# Altium PCB PCB.PcbDoc
Units mil, origin at the board's own origin, x right, y up, seen from the top; angles counter-clockwise.
Board outline 5715.03 x 2645.03 mil, 2 copper layers (Top Layer, Bottom Layer); 37 components, 35 nets, 153 pads, 6 vias.
Unrouted connection lines stored in the file: 18.
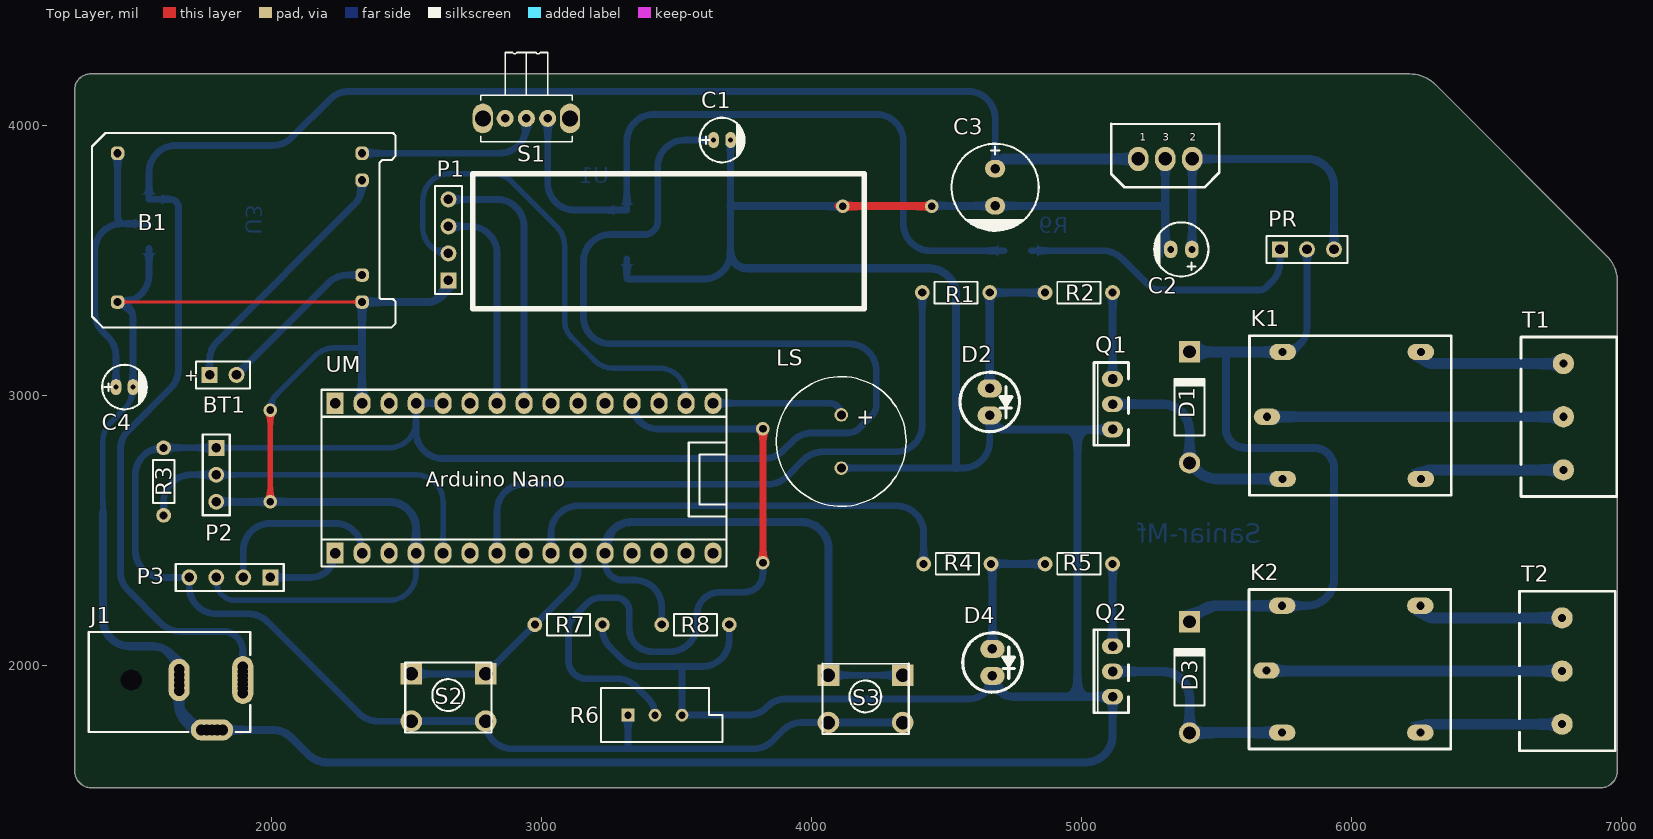
[diagram p0: Top Layer view]
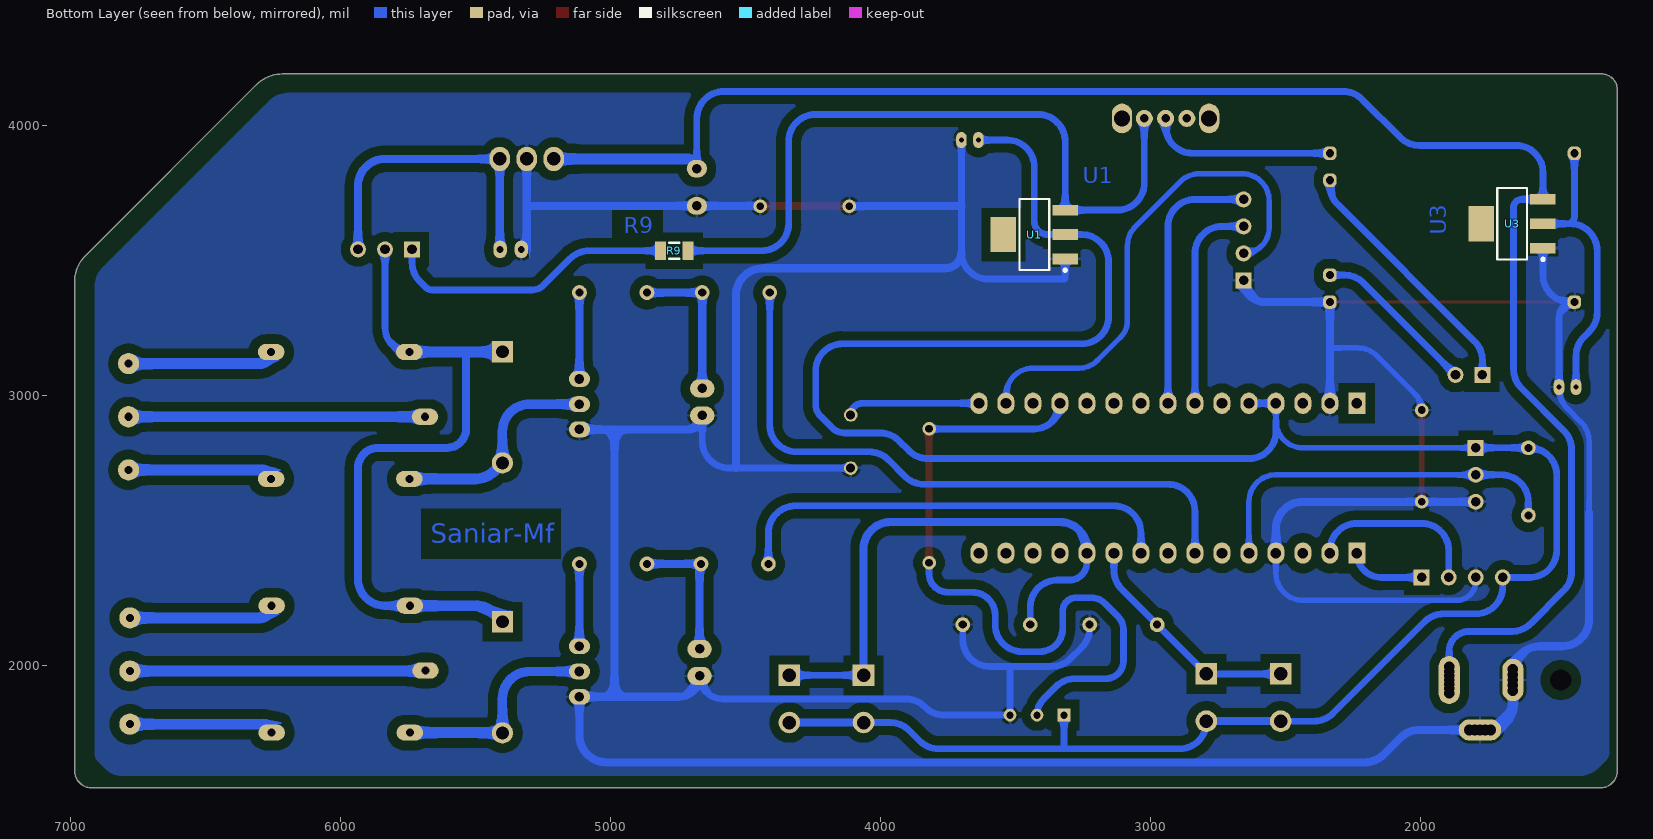
[diagram p1: Bottom Layer view, seen from below]
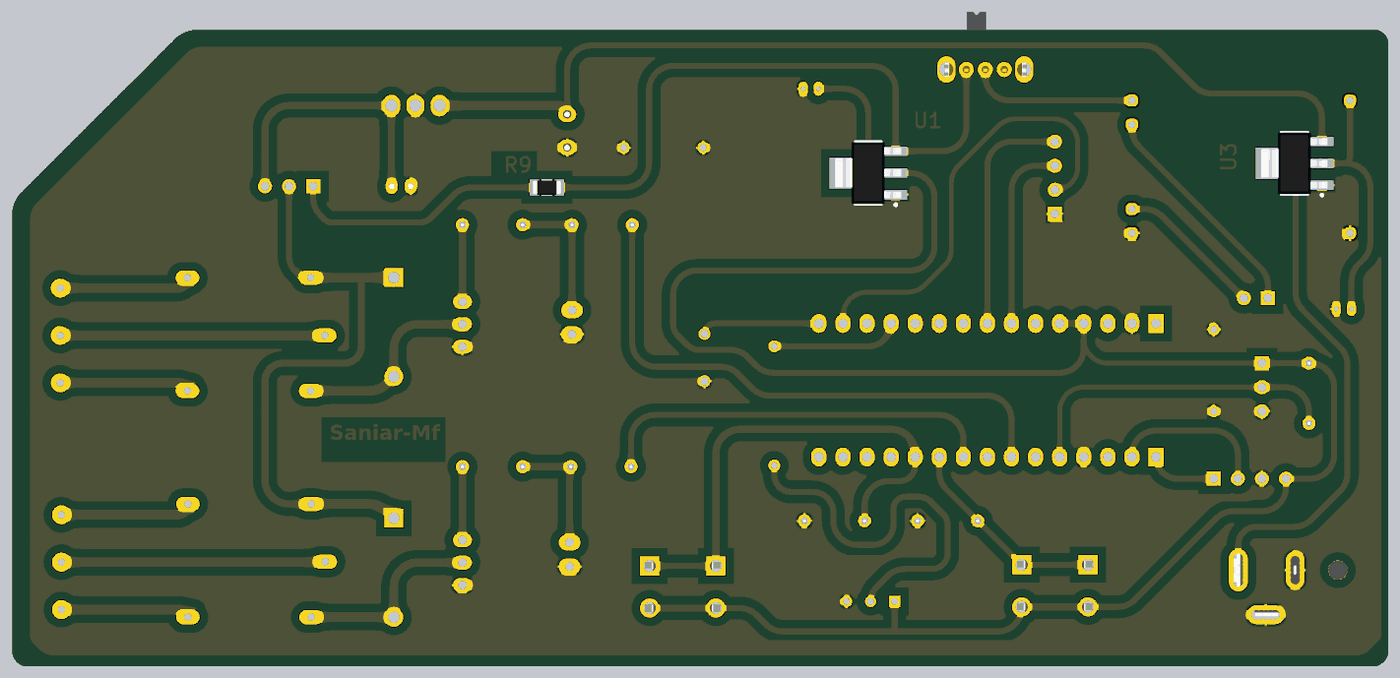
[diagram p2: 3D render of the assembled board from below, using the file's embedded part models]

## Layer stack, top to bottom
Top Solder: solder mask 0.4, Solder Resist, Dk 3.5
Top Layer: signal copper 1.4
Dielectric 1: dielectric 12.6, FR-4, Dk 4.8
Bottom Layer: signal copper 1.4
Bottom Solder: solder mask 0.4, Solder Resist, Dk 3.5

## Board outline
1269.98,1610 cw(c1285,1610) 1270.19,1612.5 cw(c1285,1615) 1269.98,1615 1269.98,4130 cw(c1330,4130) 1330,4190.02 6215,4190.02 cw(c6215,4054.29) 6310.97,4150.26 6945.26,3515.97 ccw(c6934.64,3505.36) 6945.25,3515.99 6945.26,3515.97 cw(c6849.29,3420) 6985.02,3420 6985.02,1610 cw(c6920,1610) 6920,1544.98 1335,1544.98 cw(c1335,1610)

## Design rules (kind name [scope] priority, off if disabled: settings)
Clearance Clearance_1 [InNamedPolygon('GND_L02_P008')] p1: gap=35 ignorepadtopadclearanceinfootprint=FALSE
Clearance [All] p2: gap=10 ignorepadtopadclearanceinfootprint=FALSE
Height [All] p1: minheight=0 maxheight=4000 prefheight=500
PolygonConnect [All] p1: connectstyle=Relief reliefconductorwidth=10 reliefentries=4 polygonreliefangle="90 Angle" airgapwidth=10
RoutingVias [All] p1: holewidth=28 width=50 viastyle="Through Hole" minholewidth=28 minwidth=50 maxholewidth=28 maxwidth=50
SolderMaskExpansion [All] p1: expansion=4
Width [All] p1: maxlimit=70 minlimit=10 preferedwidth=10
29 further rules are at their usual default settings.

## Components (designator, comment, footprint, x,y, rotation, side; value= is the part's Value field where it differs from the comment)
B1 "TP4056" TP4056 1429.49,3896.18 r0 top
BT1 "Battery" BAT-2 1820,3075 r0 top
C1 "10uf" "cap 00" 3668.5,3945 r180 top value=10uF
C2 "47uf" "cap 01" 5369.37,3540 r0 top value=47uF
C3 "220uf" "cap 03" 4680,3770 r90 top value=220uF
C4 "22uf" "cap 00" 1455,3030 r180 top value=22uF
D1 "Diode 1N4007" DO-41 5400,2955 r90 top
D2 "CoLED" LED_5MM 4660,3025 r90 top
D3 "Diode 1N4007" DO-41 5400,1955 r90 top
D4 "CoLED" LED_5MM 4670,2060 r90 top
J1 "Power Jack" "Power Jack" 1322.52,1945 r0 top
K1 "Relay-12vDC" Relays 5621.89,3220 r270 top
K2 "Relay-12vDC" Relays 5620,2280 r270 top
LS "Buzzer" XDCR_PS1240P02BT 4110,2828.43 r270 top
P1 "LCD" HDR1X4 2655,3425 r90 top
P2 "DS18B20" HDR1X3 1795,2805 r270 top
P3 "Serialout" HDR1X4 1995,2325 r180 top
PR "RelayVCC" HDR1X3 5735,3540 r0 top
Q1 "BD139" SOT-32 5174.06,2813.94 r90 top
Q2 "BD139" SOT-32 5174.06,1823.94 r90 top
R1 "180R" Res-(1/4) 4535,3380 r0 top value=180
R2 "1K" Res-(1/4) 4990,3380 r0 top
R3 "4.7K" Res-(1/4) 1600,2680 r270 top
R4 "180R" Res-(1/4) 4540,2375 r0 top value=180
R5 "1K" Res-(1/4) 4990,2375 r0 top
R6 "RPot" VR5 3420,1815 r0 top value=1K
R7 "10K" Res-(1/4) 3100,2150 r0 top
R8 "10K" Res-(1/4) 3570,2150 r0 top
R9 "1" "RES 1206 (3216X08L)" 4712.8,3535 r0 bottom
S1 "Switch SPDT_Subminiator" "SPDT Subminiator" 2943.74,4025 r0 top
S2 "Change" "Switch - Push to On" 2655,1880 r0 top
S3 "Mode" "Switch - Push to On" 4200,1875 r0 top
T1 "Terminal" "Terminal 1*3" 6627.52,3215.28 r270 top
T2 "Terminal" "Terminal 1*3" 6622.52,2273.43 r270 top
U1 "LM1117IMP-3.3" MP04A_N 3430,3595 r0 bottom
U3 "LM1117IMP-5.0" MP04A_N 1660,3635 r0 bottom
UM "Arduino Nano" PCBComponent_1 2975,2685 r180 top

## Footprints (in the part's own frame and the unit in brackets; to place one, negate y for a bottom-side part, rotate by r counter-clockwise, add the part's x,y. Pads: shape width x height; smd on the part's side, far side on the other; paste and mask are expansions set on the pad)
BAT-2 [mm] "Battery; 2 Leads"
  rect 1.5x1.5 hole 0.9: 1(-1.27,0)
  round 1.5 hole 0.9: 2(1.27,0)
  silkscreen extent -2.54,-1.27 2.54,1.27
"cap 00" [mm]
  oval 1x1.5 hole 0.5: 1(0.8,0) 2(-0.8,0)
  silkscreen extent -2.1,-2.1 2.1,2.1
"cap 01" [mil]
  oval 50x65 hole 25: 1(39.37,0) 2(-39.37,0)
  silkscreen extent -100,-100 100,100, body extent -99,-99 99,99, height 494
"cap 03" [mil]
  oval 65x75 hole 35: 1(68.9,0) 2(-68.9,0)
  silkscreen extent -161,-161 161,161, body extent -159,-159 157,158, height 473
DO-41 [mm] "Diode, Axial; Body 5.2 x 2.7 mm (LxDia. max), Lead Dia. 0.86 mm (max)"
  round 2 hole 1.2: 1(-5.23,0)
  rect 2x2 hole 1.2: 2(5.23,0)
  silkscreen extent -2.65,-1.4 2.75,1.4
HDR1X3 [mm] "Connector; Header; 3 Position"
  rect 1.5x1.5 hole 0.9: 1(0,0)
  round 1.5 hole 0.9: 2(2.54,0) 3(5.08,0)
  silkscreen extent -1.27,-1.27 6.35,1.27
HDR1X4 [mm] "Connector; Header; 4 Position"
  rect 1.5x1.5 hole 0.9: 1(0,0)
  round 1.5 hole 0.9: 2(2.54,0) 3(5.08,0) 4(7.62,0)
  silkscreen extent -1.27,-1.27 8.89,1.27
LED_5MM [mm]
  oval 1.7x2.3 hole 0.9: 1(0,0) 2(-2.54,0)
  silkscreen extent -4.07,-2.8 1.53,2.8
MP04A_N [mm] "SOT223, 4-Leads, Body 6.5x3.5mm, Pitch 2.3mm, Lead Span 7mm, IPC Medium Density"
  rect 2.4x1 smd: 1(-2.9,2.3) 2(-2.9,0) 3(-2.9,-2.3)
  rect 2.4x3.3 smd: 4(2.9,0)
  silkscreen extent -3.02,-3.35 1.4,3.47, body extent -3.49,-3.24 3.49,3.24, height 1.64
PCBComponent_1 [mm]
  rect 1.6x2 hole 1: 1(18.796,6.858) 30(18.796,-7.239)
  oval 1.6x2 hole 1: 2(16.256,6.858) 3(13.716,6.858) 4(11.176,6.858) 5(8.636,6.858) 6(6.096,6.858) 7(3.556,6.858) 8(1.016,6.858) 9(-1.524,6.858) 10(-4.064,6.858) 11(-6.604,6.858) 12(-9.144,6.858) 13(-11.684,6.858) 14(-14.224,6.858) 15(-16.764,6.858) 16(-16.764,-7.239) 17(-14.224,-7.239) 18(-11.684,-7.239) 19(-9.144,-7.239) 20(-6.604,-7.239) 21(-4.064,-7.239) 22(-1.524,-7.239) 23(1.016,-7.239) 24(3.556,-7.239) 25(6.096,-7.239) 26(8.636,-7.239) 27(11.176,-7.239) 28(13.716,-7.239) 29(16.256,-7.239)
  silkscreen extent -18.03,-8.51 20.07,8.13
"Power Jack" [mm] "Power Adaptor Jack"
  round 1.5 hole 1: 1(14.5,-1.25) 1(14.5,-0.8) 1(14.5,-0.4) 1(14.5,0.4) 1(14.5,0.8) 1(14.5,1.25) 2(8.5,-1) 2(8.5,1) 2(8.5,-0.5) 2(8.5,0.5) 3(10.6,-4.7) 3(11.1,-4.7) 3(12.1,-4.7) 3(12.6,-4.7)
  oval 2x4.5 hole 1: 1(14.5,0)
  oval 2x4 hole 1: 2(8.5,0)
  oval 4x2 hole 1: 3(11.6,-4.7)
  round 1.9 hole 2: MH(4,0)
  silkscreen extent 0,-4.9 15.2,4.5, body extent 0,-4.9 15.2,4.5, height 11
Relays [mil]
  oval 60x98.43 hole 30: 1(300,65) 2(60,635) 3(530,635) 4(60,123.11) 5(530,123.11)
  silkscreen extent 0,0 591,748
"RES 1206 (3216X08L)" [mm] "Chip Resistor, 2-Leads, Body 3.2x1.6mm, IPC High Density _ (0.125 W)"
  rect 1.05x1.7 smd: 1(0,0) 2(2.596,0)
  silkscreen extent 0.8,-0.75 1.8,0.75, body extent -0.23,-0.76 2.82,0.76, height 0.6
Res-(1/4) [mil]
  round 55 hole 30: 1(-125,0) 2(125,0)
  silkscreen extent -80,-40 80,40, body extent -135,-36 135,36, height 115
SOT-32 [mm]
  oval 1.5x2 hole 0.9: B(6.25,1.5) C(3.875,1.5) E(1.5,1.5)
  silkscreen extent 0,0 7.8,3.25
"SPDT Subminiator" [mm] "Subminiator SPDT switch"
  round 1.6 hole 0.8: 1(2,0) 2(0,0) 3(-2,0)
  oval 1.9x2.8 hole 1.5: M2(-4.1,0) M2(4.1,0)
  silkscreen extent -4.3,-2.2 4.3,6.2, body extent -4.31,-2.28 4.3,6.09, height 4.7
"Switch - Push to On" [mil]
  rect 80x80 hole 50: 1(-137.5,87.5) 1(137.5,87.5)
  round 80 hole 50: 2(-137.5,-87.5) 2(137.5,-87.5)
  silkscreen extent -160,-130 160,130, body extent -155,-121 157,123, height 205
"Terminal 1*3" [mm]
  round 2 hole 0.762: 1(2.5,4) 2(7.5,4) 3(12.5,4)
  silkscreen extent 0,0 15,9
TP4056 [mm]
  rrect70% 1.27x1.27 hole 0.762 mask+0.2: 1(0,0) 2(0,-14) 3(23,0) 4(23,-2.54) 5(23,-11.46) 6(23,-14)
  silkscreen extent -2.41,-16.38 26.16,1.91
VR5 [mm] "Thru-Hole; 3 Leads"
  rect 1.2x1.2 hole 0.7: 1(-2.54,0)
  round 1.2 hole 0.7: 2(0,0) 3(2.54,0)
  silkscreen extent -5.08,-2.54 6.35,2.54
XDCR_PS1240P02BT [mm]
  round 1.28 hole 0.85: 1(-2.5,0) 2(2.5,0)
  silkscreen extent -6.1,-6.1 6.1,6.1

## Part data
B1: "li ion charger board"
BT1: "Multicell Battery", LatestRevisionDate=17-Jul-2002, LatestRevisionNote="Re-released for DXP Platform.", PackageDescription="Battery; 2 Leads", PackageReference=BAT-2, Published=24-Mar-1999, Publisher="Altium Limited"
C1 C2 C4: library part Cap-Polar, "Polar Capacitor", Voltage=16V, Adding Date=1387/12/20, Designer="Saeid Jorablo", Organazation=ControTec
C3: library part Cap-Polar, "Polar Capacitor", Voltage=25V, Adding Date=1387/12/20, Designer="Saeid Jorablo", Organazation=ControTec
D1 D3: "1 Amp General Purpose Rectifier", Code_JEDEC=DO-204-AL, ComponentLink1Description="Manufacturer Link", ComponentLink1URL=http://www.fairchildsemi.com/, ComponentLink2Description=Datasheet, ComponentLink2URL=http://www.fairchildsemi.com/ds/1N%2F1N4001.pdf, DatasheetVersion=1998, LatestRevisionDate=17-Jul-2002, LatestRevisionNote="Re-released for DXP Platform.", PackageDescription="Diode, Axial; Body 5.2 x 2.7 mm (LxDia. max), Lead Dia. 0.86 mm (max)", PackageReference=DO-41, PackageVersion=Aug-1999, Published=8-Jun-2000, Publisher="Altium Limited"
D2 D4: library part LED, "Blue LED for Cooler"
K1: library part Relay-05vDC, "Cooler Relay", ComponentLinkURL=www.picpars.com, Designer="Seyed Mohsen Ghasemain"
K2: library part Relay-05vDC, "Heater Relay", ComponentLinkURL=www.picpars.com, Designer="Seyed Mohsen Ghasemain"
LS: library part PS1240P02BT, "Buzzers Transducer, Externally Driven Piezo 3V 4kHz 60dB @ 3V, 10cm Through Hole PC Pins", Package="2020 TDK", Availability=Unavailable, MF=TDK, MP=PS1240P02BT, Price=None, SnapEDA_Link=https://www.snapeda.com/parts/PS1240P02BT/TDK/view-part/53420/?ref=snap
P1: library part "Header 4", "I2C Oled", LatestRevisionDate=17-Jul-2002, LatestRevisionNote="Re-released for DXP Platform.", Publisher="Altium Limited"
P2 PR: library part "Header 3", "Header, 3-Pin", LatestRevisionDate=17-Jul-2002, LatestRevisionNote="Re-released for DXP Platform.", Publisher="Altium Limited"
P3: library part "Header 4", "Header, 4-Pin", LatestRevisionDate=17-Jul-2002, LatestRevisionNote="Re-released for DXP Platform.", Publisher="Altium Limited"
Q1 Q2: "NPN Transistor", De="Seyed Mohsen Ghasemian", E-mail=picpars@gmail.com, web=www.picpars.com
R1 R2 R3 R4 R5 R7 R8 R9: library part Resistor, "Resistor", Power="1/8 W", Tolerance=5%
R6: "Potentiometer", LatestRevisionDate=17-Jul-2002, LatestRevisionNote="Re-released for DXP Platform.", PackageDescription="Variable Resistor, Thru-Hole; 3 Leads", PackageReference=VR5, Published=8-Jun-2000, Publisher="Altium Limited", Set Position=0.5, Sim Note="Enter the Resistance value and the set point into parameter fields."
S1: "Subminiator SPDT Switch", Company=E.P.I.L, Design date=2011/11/02
S2 S3: library part "Switch PB", "Push Button Switch"
T1: library part "Terminal 1*3", "Cooler Terminal", ComponentLinkURL=www.picpars.com, Designer="Seyed Mohsen Ghasemain", E-mail=picpars@gmail.com
T2: library part "Terminal 1*3", "Heater Terminal", ComponentLinkURL=www.picpars.com, Designer="Seyed Mohsen Ghasemain", E-mail=picpars@gmail.com
U1: library part LM1117IMP-x.x, "3.3V Requlator. / if you use 3V relay Replace it with 15ohm Resistor :)", Manufacturer="National Semiconductor", PackageTopMarking=XYTT*N05B, PowerWise=N, Supplier Part Number 1=7614123, Code_IPC=SOT223-4, Code_JEDEC=TO-261-AA, ComponentLink1Description="LM1117 Datasheet", ComponentLink1URL=http://www.national.com/ds/LM/LM1117.pdf, ComponentLink2Description="LM1117 Web Page", ComponentLink2URL=http://www.national.com/pf/LM/LM1117.html, ComponentLink3Description="MP04A Package Page", ComponentLink3URL=http://www.national.com/packaging/folders/mp04a.html, CompType="LDO IC", DatasheetVersion=Apr-2006, PackageDescription="Molded SOT-223, 6.50 x 3.56 x 1.6mm Body, 4 Lead, 2.3mm Pitch", PackageReference=MP04A, PackageVersion="revB, Apr-2003", PartNumber=LM1117IMP-3.3, PinCount=4, Published=4-Dec-2008, Publisher="Altium Limited", RoHS=N, Supplier 1=Farnell
U3: library part LM1117IMP-x.x, "x.x Volt, 800mA Low-Dropout Linear Regulator, 4-pin SOT-223", Manufacturer="National Semiconductor", PackageTopMarking=XYTT*N05B, PartNumber=LM1117IMP-3.3, PowerWise=N, Supplier Part Number 1=7614123, Code_IPC=SOT223-4, Code_JEDEC=TO-261-AA, ComponentLink1Description="LM1117 Datasheet", ComponentLink1URL=http://www.national.com/ds/LM/LM1117.pdf, ComponentLink2Description="LM1117 Web Page", ComponentLink2URL=http://www.national.com/pf/LM/LM1117.html, ComponentLink3Description="MP04A Package Page", ComponentLink3URL=http://www.national.com/packaging/folders/mp04a.html, CompType="LDO IC", DatasheetVersion=Apr-2006, PackageDescription="Molded SOT-223, 6.50 x 3.56 x 1.6mm Body, 4 Lead, 2.3mm Pitch", PackageReference=MP04A, PackageVersion="revB, Apr-2003", PinCount=4, Published=4-Dec-2008, Publisher="Altium Limited", RoHS=N, Supplier 1=Farnell
UM: library part Component_1
J1: Adding Date=10/21/2009, Company=Personal, Designer="Saeid Jorablo", Project Name=Laser

## Free pads (board coordinates)
  oval 75x90 hole 50: 1(5210,3875) 2(5410,3875) 3(5310,3875)

## Via types
v1: diameter 50, hole 28, Top Layer to Bottom Layer, 6 vias

## Nets (pads, with @x,y where several pads share a name; then routed paths per layer and width w, separated by ;. In a path a pad name is that pad's centre, name@x,y a point inside that pad or via, vN(x,y) a via of type N, cw(c..) or ccw(c..) an arc to the next point about the centre after c; other vN are vias at no path point)
+5: B1.1 C4.1 U3.2 | length 1062.6
  Bottom Layer w25: C4.1 1423.5,3145.07 ccw(c1323.5,3145.07) 1394.21,3215.79 1374.29,3235.71 cw(c1445,3306.42) 1345,3306.42 1345,3535 cw(c1445,3535) 1445,3635 1455,3635 ; B1.1 1429.49,3660.51 ccw(c1455,3660.51) 1455,3635 ; U3.2 1455,3635
+12: C2.1 pad.2 PR.3 | length 1152.8
  Bottom Layer w30: C2.1 ccw(c5408.74,3541.26) 5410,3541.26 pad.2 5835,3875 cw(c5835,3775) 5935,3775 PR.3
BatVCC: R9.1 S1.1 U1.3 | length 2717.5
  Bottom Layer w25: S1.1 3022.48,3785.55 ccw(c3122.48,3785.55) 3122.48,3685.55 U1.3 3315.83,3940 cw(c3415.83,3940) 3415.83,4040 4240,4040 cw(c4240,3940) 4340,3940 4340,3635 ccw(c4440,3635) 4440,3535 R9.1
Cooler: R1.1 UM.7 | length 2375.3
  Bottom Layer w25: UM.7 2835,2570 cw(c2935,2570) 2935,2670 3838.58,2670 ccw(c3838.58,2770) 3909.29,2699.29 3970.71,2760.71 cw(c4041.42,2690) 4041.42,2790 4310,2790 ccw(c4310,2890) 4410,2890 R1.1
GND: B1.2 B1.6 C1.2 C2.2 C3.2 C4.2 D2.2 D4.2 J1.2 J1.3 LS.2 P1.1 P2.3 P3.3 pad.3 Q1.E Q2.E R6.3 R7.2 R8.2 U1.1 U3.1 UM.4 UM.29 | length 19224.1
  Top Layer w10: B1.2 B1.6
  Top Layer w20: v1(1995,2605) v1(1995,2945)
  Top Layer w30: v1@4100,3700 v1(4115,3700) v1(4445,3700)
  Bottom Layer w20: 1375,2565 1375,2828.58 cw(c1475,2828.58) 1404.29,2899.29 1457.21,2952.21 ccw(c1386.5,3022.92) 1486.5,3022.92 C4.2 ; P3.3 1795,2310 ccw(c1865,2310) 1865,2240 2435,2240 ccw(c2435,2340) 2535,2340 UM.4 ; v1(1995,2945) cw(c2079.5,2945) 2019.75,3004.75 2160.71,3145.71 cw(c2231.42,3075) 2231.42,3175 2335,3175
  Bottom Layer w25: C4.2 1486.5,3287.99 ccw(c1429.49,3287.99) B1.2 1445.83,3345 ccw(c1445.83,3445) 1545.83,3445 U3.1 ; R7.2 3225,2136.42 ccw(c3325,2136.42) 3254.29,2065.71 3295.71,2024.29 ccw(c3366.42,2095) 3366.42,1995 3520,1995 ; U1.1 3315.83,3434.17 ccw(c3320,3434.17) 3320,3430 3600,3430 ccw(c3600,3530) 3700,3530 3700,3700 C1.2 ; R8.2 3695,2095 cw(c3595,2095) 3595,1995 3520,1995 ; LS.2 4535,2730 4560,2730 ccw(c4560,2830) 4660,2830 4660,2871.57 ; D4.2 cw(c4585,1960) 4585,1875 3906.42,1875 ccw(c3906.42,1775) 3835.71,1845.71 3834.29,1844.29 cw(c3763.58,1915) 3763.58,1815 R6.3 3520,1995
  Bottom Layer w30: 1375,2565 1375,2170 ccw(c1475,2170) 1475,2070 1557.17,2070 cw(c1557.17,1970) 1657.17,1970 J1.2@1657.17,1964.68 ; P2.3 v1(1995,2605) 2435,2605 cw(c2435,2505) 2535,2505 UM.4 ; J1.3@1798.9,1759.96 1818.58,1759.96 2003.62,1759.96 cw(c2003.62,1659.96) 2074.33,1730.67 2135.71,1669.29 ccw(c2206.42,1740) 2206.42,1640 5015,1640 ccw(c5015,1740) 5115,1740 Q2.E 4985,1882.99 ; UM.29 2335,3175 B1.6 2575,3345 ccw(c2575,3425) P1.1 ; 3700,3530 ccw(c3760,3530) 3760,3470 4435,3470 cw(c4435,3370) 4535,3370 4535,2730 ; 3700,3700 v1(4115,3700) ; v1(4445,3700) cw(c4446.1,3700) 4446.1,3701.1 C3.2 5300.59,3701.1 ccw(c5300.59,3714.41) 5310,3705 ; 4660,2871.57 D2.2 ccw(c4712.01,2925) 4712.01,2872.99 4985,2872.99 ; D4.2 ccw(c4747.01,1960) 4747.01,1882.99 4985,1882.99 ; Q1.E 4985,2872.99 ; pad.3 5310,3705 ; C2.2 5310,3560 5310,3705 ; 4985,1882.99 4985,2872.99
  Bottom Layer w40: J1.2@1657.17,1964.68 1657.17,1925.32 1657.17,1859.96 ccw(c1757.17,1859.96) 1757.17,1759.96 1759.53,1759.96 1779.21,1759.96 J1.3@1798.9,1759.96
Heater: R4.1 UM.9 | length 1684.2
  Bottom Layer w25: UM.9 3035,2490 cw(c3135,2490) 3135,2590 4315,2590 cw(c4315,2490) 4415,2490 R4.1
NetB1_3: B1.3 S1.2 | length 694.6
  Bottom Layer w25: B1.3 2843.74,3896.18 ccw(c2843.74,3996.18) 2943.74,3996.18 S1.2
NetB1_4: B1.4 BT1.1 | length 946.6
  Bottom Layer w25: BT1.1 1770,3128.58 cw(c1870,3128.58) 1799.29,3199.29 2305.71,3705.71 ccw(c2235,3776.42) 2335,3776.42 B1.4
NetB1_5: B1.5 BT1.2 | length 604
  Bottom Layer w25: BT1.2 2210.71,3415.71 cw(c2281.42,3345) 2281.42,3445 B1.5@2325,3445
NetC3_1: C3.1 J1.1 pad.1 U3.3 | length 6407.9
  Bottom Layer w25: J1.1@1893.39,1960.75 1893.39,1976.5 1893.39,1994.21 1893.39,2051.61 ccw(c1820,2051.61) 1820,2125 1661.42,2125 cw(c1661.42,2225) 1590.71,2154.29 1469.29,2275.71 cw(c1540,2346.42) 1440,2346.42 1440,2798.58 cw(c1540,2798.58) 1469.29,2869.29 1625.71,3025.71 ccw(c1555,3096.42) 1655,3096.42 1655,3695 ccw(c1624.45,3695) 1624.45,3725.55 U3.3 1545.83,3825 cw(c1645.83,3825) 1645.83,3925 2003.58,3925 ccw(c2003.58,4025) 2074.29,3954.29 2215.71,4095.71 cw(c2286.42,4025) 2286.42,4125 4580,4125 cw(c4580,4025) 4680,4025 C3.1
  Bottom Layer w40: C3.1 cw(c4716.1,3838.9) 4716.1,3875 pad.1
NetD1_1: D1.1 K1.5 Q1.C | length 824.7
  Bottom Layer w35: Q1.C 5300,2966.5 cw(c5300,2866.5) 5400,2866.5 D1.1
  Bottom Layer w40: D1.1 5429.81,2719.29 ccw(c5500.52,2790) 5500.52,2690 K1.5
NetD2_1: D2.1 R1.2 R2.1 | length 560
  Bottom Layer w30: D2.1 R1.2 R2.1
NetD3_1: D3.1 K2.5 Q2.C | length 813.1
  Bottom Layer w35: Q2.C 5300,1976.5 cw(c5300,1876.5) 5400,1876.5 D3.1
  Bottom Layer w40: D3.1 cw(c5400.91,1749.09) 5400.91,1750 K2.5
NetD4_1: D4.1 R4.2 R5.1 | length 517.9
  Bottom Layer w30: D4.1 4670,2370 ccw(c4665,2370) R4.2 R5.1
NetK1_1: K1.1 T1.2 | length 1098.1
  Bottom Layer w40: K1.1 T1.2
NetK1_2: K1.2 T1.1 | length 552.7
  Bottom Layer w40: K1.2 ccw(c6300.04,3160) 6300.04,3116.85 T1.1
NetK1_3: K1.3 T1.3 | length 547
  Bottom Layer w40: K1.3 cw(c6290.04,2690) 6290.04,2723.15 T1.3
NetK2_1: K2.1 T2.2 | length 1096.1
  Bottom Layer w40: K2.1 ccw(c5686.85,1980) 5686.85,1978.15 T2.2
NetK2_2: K2.2 T2.1 | length 550.7
  Bottom Layer w40: K2.2 ccw(c6300,2220) 6300,2175 T2.1
NetK2_3: K2.3 T2.3 | length 542.9
  Bottom Layer w40: K2.3 cw(c6286.3,1750) 6286.3,1781.3 T2.3
NetLS_1: LS.1 UM.16 | length 499.6
  Bottom Layer w25: UM.16 4066.85,2970 cw(c4066.85,2926.85) LS.1
NetP1_2: P1.2 UM.17 | length 1858
  Bottom Layer w20: P1.2 cw(c2655,3620) 2560,3620 2560,3720 cw(c2660,3720) 2660,3820 2818.58,3820 cw(c2818.58,3720) 2889.29,3790.71 3055.71,3624.29 cw(c2985,3553.58) 3085,3553.58 3085,3275 ccw(c3169.5,3275) 3109.75,3215.25 3195.71,3129.29 ccw(c3266.42,3200) 3266.42,3100 3435,3100 cw(c3435,3000) 3535,3000 UM.17
NetP1_3: P1.3 UM.24 | length 792.1
  Bottom Layer w25: P1.3 2735,3625 cw(c2735,3525) 2835,3525 UM.24
NetP1_4: P1.4 UM.23 | length 992.1
  Bottom Layer w25: P1.4 2835,3725 cw(c2835,3625) 2935,3625 UM.23
NetP2_2: P2.2 R3.2 UM.5 | length 1389.2
  Bottom Layer w20: P2.2 2535,2705 cw(c2535,2605) 2635,2605 UM.5
  Bottom Layer w25: R3.2 1600,2605 cw(c1700,2605) 1700,2705 P2.2
NetP3_1: P3.1 UM.1 | length 291.4
  Bottom Layer w25: P3.1 2145,2325 ccw(c2145,2415) UM.1
NetP3_2: P3.2 UM.2 | length 664.2
  Bottom Layer w25: P3.2 1895,2425 cw(c1995,2425) 1995,2525 2235,2525 cw(c2235,2425) 2335,2425 UM.2
NetPR_1: PR.1 R9.2 | length 1082.2
  Bottom Layer w25: R9.2 5078.58,3535 cw(c5078.58,3435) 5149.29,3505.71 5247.32,3407.68 ccw(c5290,3450.36) 5290,3390 5660.86,3390 ccw(c5660.86,3424.14) 5685,3400 5705.71,3420.71 ccw(c5635,3491.42) 5735,3491.42 PR.1
NetQ1_B: Q1.B R2.2 | length 320
  Bottom Layer w30: Q1.B R2.2
NetQ2_B: Q2.B R5.2 | length 305
  Bottom Layer w30: Q2.B R5.2
NetR7_1: R7.1 S2.1 UM.10 | length 860.1
  Bottom Layer w25: S2.1@2517.5,1967.5 2792.5,1967.5 R7.1 3105.71,2280.71 ccw(c3035,2351.42) 3135,2351.42 UM.10
NetR8_1: R8.1 S3.1 UM.11 | length 2103.3
  Bottom Layer w25: UM.11 3235,2380 ccw(c3300,2380) 3300,2315 3345,2315 cw(c3345,2215) 3445,2215 R8.1 ; S3.1@4062.5,1962.5 S3.1@4337.5,1962.5
  Bottom Layer w30: UM.11 3235,2430 cw(c3335,2430) 3335,2530 3962.5,2530 cw(c3962.5,2430) 4062.5,2430 S3.1@4062.5,1962.5
PotNet: R6.2 UM.19 | length 2718.6
  Top Layer w25: v1(3820,2380) v1(3820,2875)
  Bottom Layer w25: UM.19 ccw(c3430,2970) 3430,2875 v1(3820,2875) ; R6.2 ccw(c3335.5,1815) 3395.25,1874.75 3349.29,1920.71 ccw(c3278.58,1850) 3278.58,1950 3165,1950 cw(c3165,2015) 3100,2015 3100,2131.72 cw(c3168.28,2131.72) 3120,2180 3168.79,2228.79 cw(c3220,2177.57) 3220,2250 3275,2250 cw(c3275,2200) 3325,2200 3325,2135 ccw(c3410,2135) 3410,2050 3475,2050 ccw(c3475,2150) 3575,2150 3575,2185 cw(c3660,2185) 3660,2270 3750,2270 ccw(c3750,2340) 3820,2340 v1(3820,2380)
RelayVcc: D1.2 D3.2 K1.4 K2.4 PR.2 | length 2566.6
  Bottom Layer w25: K1.4 ccw(c5745,3250) 5835,3250 PR.2
  Bottom Layer w30: 5535,3160 5535,2875 ccw(c5605,2875) 5605,2805 5860,2805 cw(c5860,2730) 5935,2730 5935,2320 cw(c5835,2320) 5835,2220 K2.4
  Bottom Layer w40: D3.2 5429.81,2190.71 cw(c5500.52,2120) 5500.52,2220 K2.4 ; D1.2 ccw(c5402.19,3163.09) 5402.19,3160 5535,3160 K1.4
VCC: C1.1 P2.1 P3.4 R3.1 R6.1 S2.2 S3.2 U1.2 UM.26 UM.27 | length 9205.4
  Bottom Layer w20: P2.1 2435,2805 ccw(c2435,2905) 2535,2905 UM.27@2535,2935
  Bottom Layer w25: P2.1 R3.1 1595,2805 ccw(c1595,2705) 1495,2705 1495,2425 ccw(c1595,2425) 1595,2325 P3.4 1695,2290 ccw(c1795,2290) 1795,2190 1913.58,2190 cw(c1913.58,2090) 1984.29,2160.71 2323.21,1821.79 ccw(c2393.92,1892.5) 2393.92,1792.5 S2.2@2517.5,1792.5 ; 2535,2905 2535,2865 ccw(c2635,2865) 2635,2765 3823.58,2765 ccw(c3823.58,2865) 3894.29,2794.29 3930.71,2830.71 cw(c4001.42,2760) 4001.42,2860 4131.72,2860 ccw(c4131.72,2928.28) 4180,2880 4222.32,2922.32 ccw(c4179.64,2965) 4240,2965 4240,3090 ccw(c4140,3090) 4140,3190 3255,3190 cw(c3255,3290) 3155,3290 3155,3495 cw(c3255,3495) 3255,3595 U1.2 3380,3595 ccw(c3380,3645) 3430,3645 3430,3845 cw(c3530,3845) 3530,3945 C1.1 ; UM.27@2535,2935 UM.27 UM.26 ; S2.2@2792.5,1792.5 2792.5,1790 ccw(c2892.5,1790) 2892.5,1690 3315,1690 ; R6.1 3320,1695 cw(c3315,1695) 3315,1690 ; S3.2@4062.5,1787.5 3963.92,1787.5 ccw(c3963.92,1687.5) 3893.21,1758.21 3854.29,1719.29 cw(c3783.58,1790) 3783.58,1690 3315,1690
  Bottom Layer w30: S2.2@2517.5,1792.5 S2.2@2792.5,1792.5 ; S3.2@4062.5,1787.5 S3.2@4337.5,1787.5
pads on no net: J1.MH S1.3 S1.M2 U1.4 U3.4 UM.3 UM.6 UM.8 UM.12 UM.13 UM.14 UM.15 UM.18 UM.20 UM.21 UM.22 UM.25 UM.28 UM.30

## Polygon pours and split planes (outlines as drawn)
GND on Bottom Layer "GND_L02_P008" (solid, remove dead copper, pour order 8): 1341.72,4120 6193.58,4120 cw(c6193.58,4020) 6264.29,4090.71 6880.71,3474.29 cw(c6810,3403.58) 6910,3403.58 6910,1670 cw(c6873.79,1670) 6899.39,1644.39 6870,1615 cw(c6809.64,1675.35) 6809.64,1590 1410,1590 cw(c1410,1686.57) 1341.72,1618.28 1310,1650 cw(c1334.14,1674.14) 1300,1674.14 1300,4073.79 cw(c1351.21,4073.79) 1315,4110

## Other copper
Bottom Layer:
  text "Saniar-Mf" at 5665,2430 h120

## Silkscreen, mask and mechanical layers (free items; w line width, h text height)
Top Overlay:
  lines w7.87: 5110,4005 5510,4005
  lines w10: 5110,4005 5110,3820 5160,3770 5455,3770 5510,3825 5510,4005
  lines w20: 2745,3320 2745,3820 4195,3820 4195,3320 2745,3320
  text "1" at 5215,3941.93 h27.56
  text "3" at 5300,3941.93 h27.56
  text "2" at 5401,3941.93 h27.56
  text "+" at 4165,2890 h60
Drill Drawing:
  lines w25: 1285,1610 ccw(c1335,1610) 1335,1560 1370,1560 5820,1560 6920,1560 ccw(c6920,1610) 6970,1610 6970,3420 ccw(c6849.29,3420) 6934.64,3505.36 6300.36,4139.64 ccw(c6215,4054.29) 6215,4175 1370,4175 1330,4175 ccw(c1330,4130) 1285,4130 1285,1615

## Text inside footprints (layer, text, board x,y; h text height)
BT1: Top Overlay "+" at 1675.51,3052.28 h45.28